# Altium PCB Ecg.PcbDoc
Units mm, origin at the board's own origin, x right, y up, seen from the top; angles counter-clockwise.
Board outline 95 x 41 mm, 2 copper layers (Top Layer, Bottom Layer), stack 0.325 mm thick; 107 components, 77 nets, 403 pads, 700 vias.
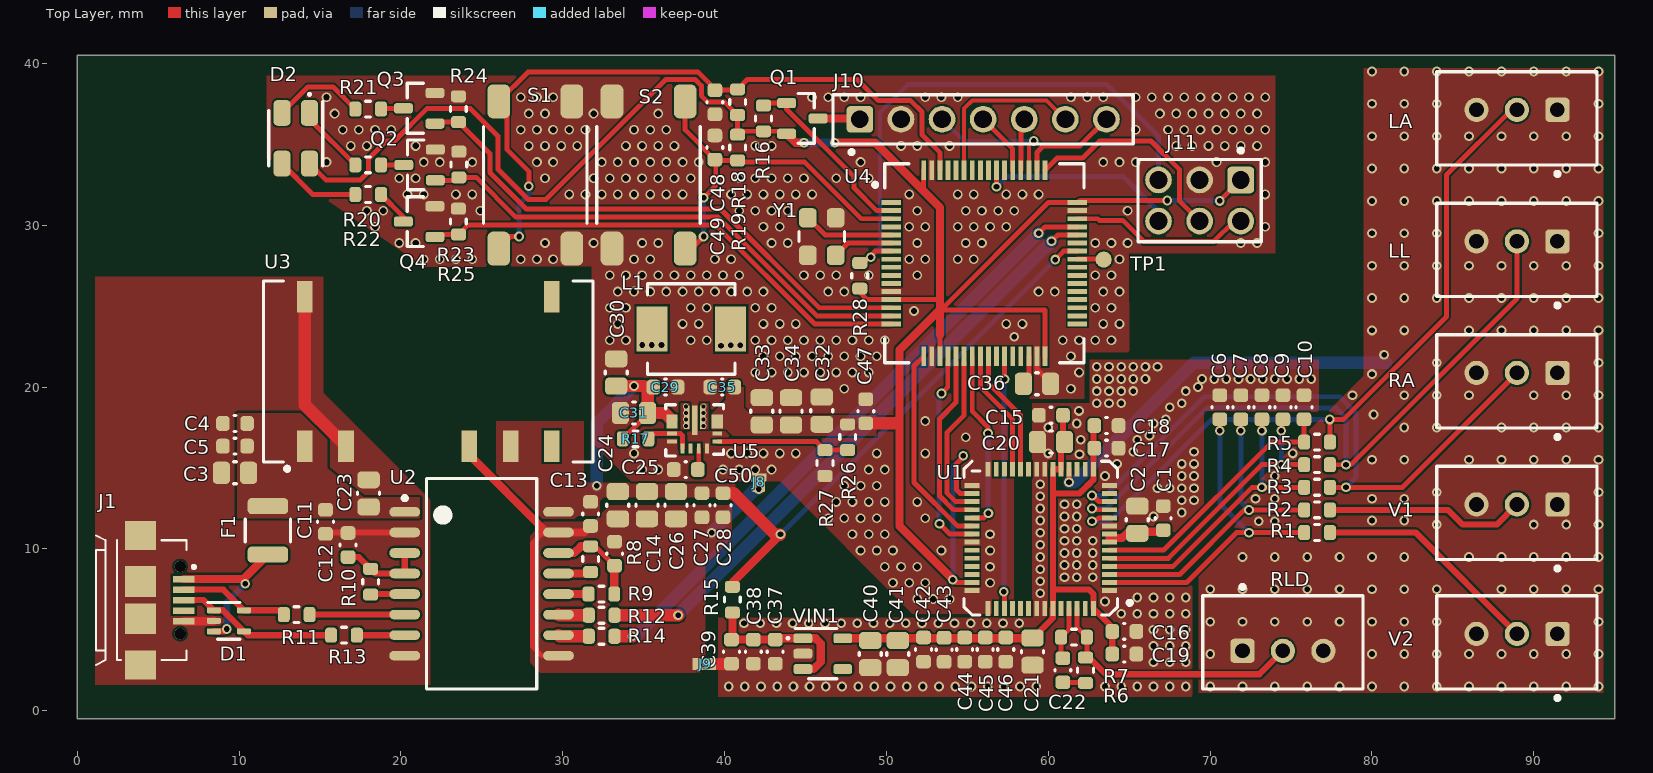
[diagram p0: Top Layer view]
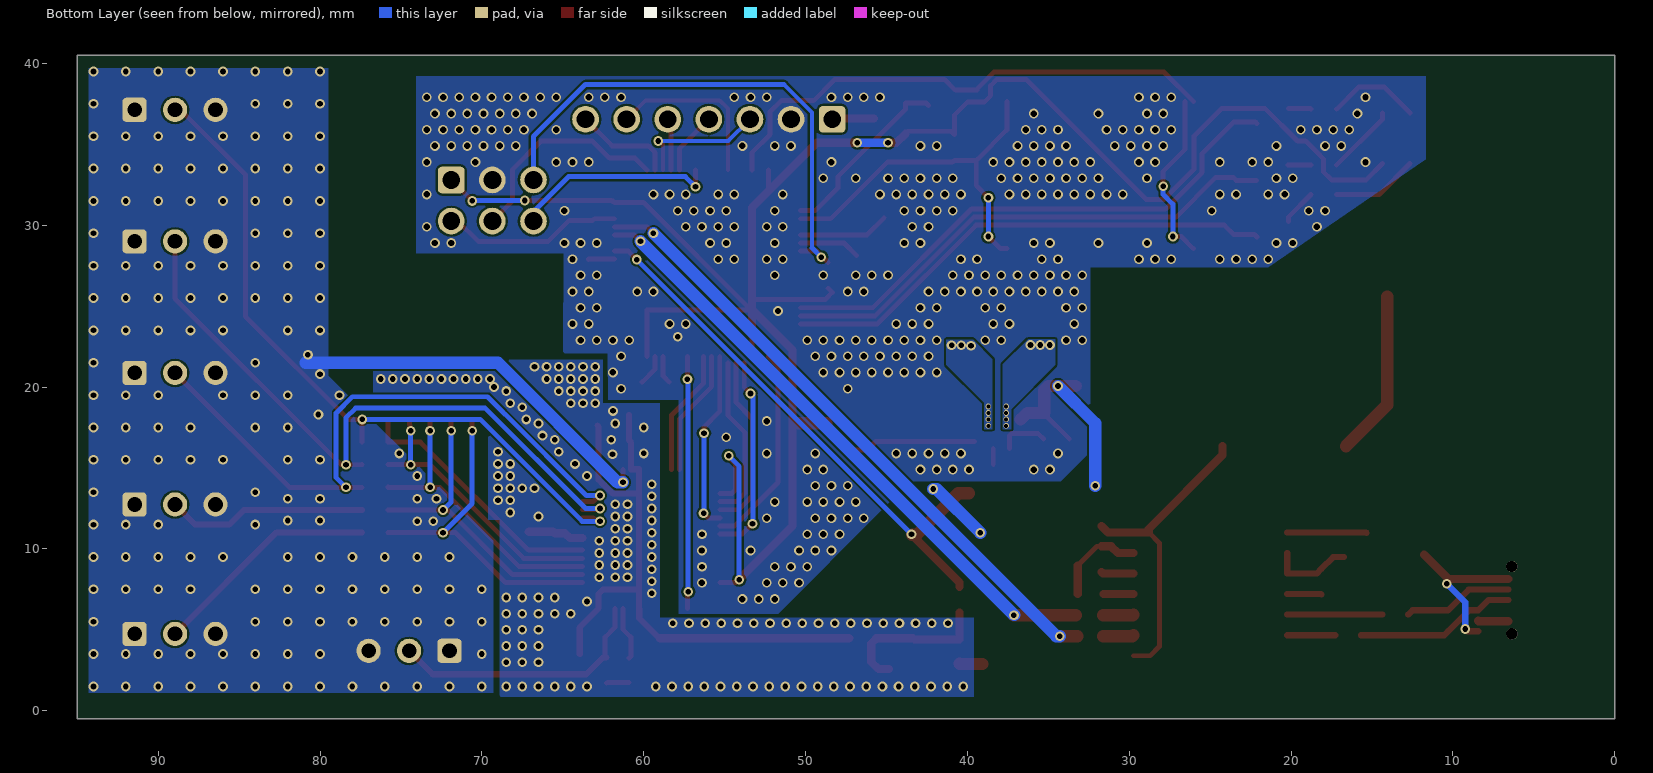
[diagram p1: Bottom Layer view, seen from below]
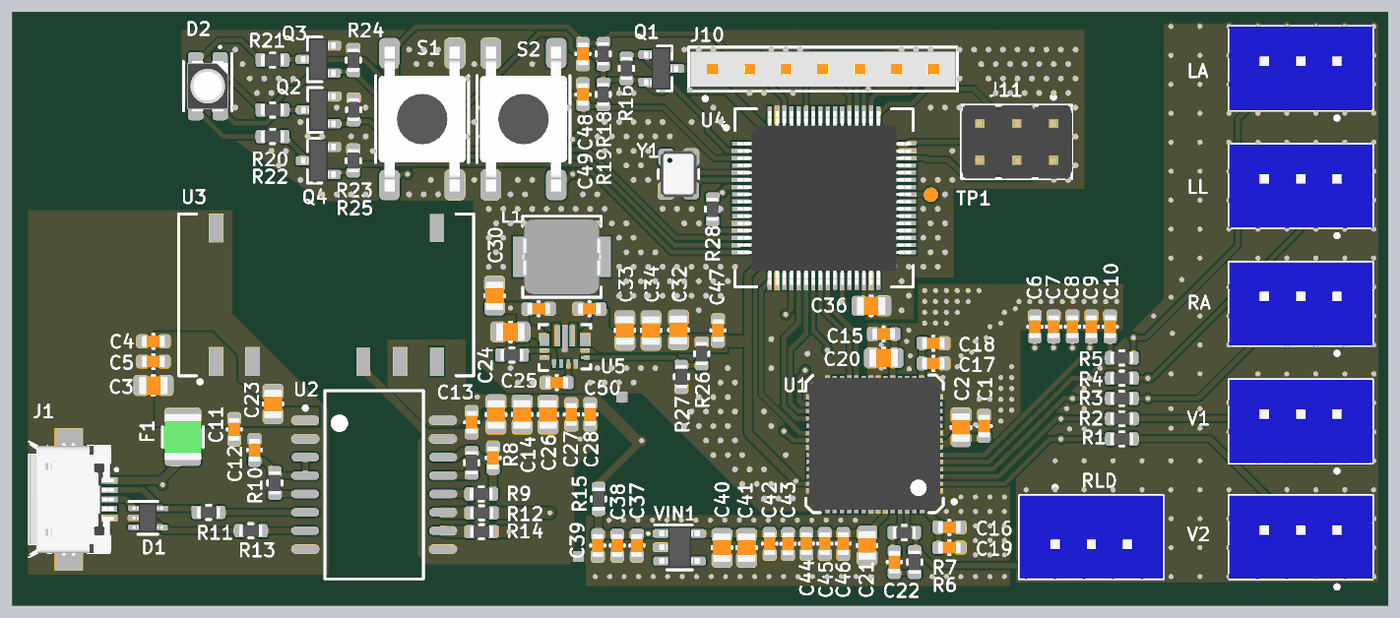
[diagram p2: 3D render of the assembled board from above, using the file's embedded part models]

## Layer stack, top to bottom
Top Solder: solder mask 0.0102, Solder Resist, Dk 3.5
Top Layer: signal copper 0.0356
Dielectric 1: core 0.254, FR-4, Dk 4.2
Bottom Layer: signal copper 0.0356
Bottom Solder: solder mask 0.0102, Solder Resist, Dk 3.5

## Board outline
0,-0.5 95,-0.5 95,40.5 0,40.5

## Design rules (kind name [scope] priority, off if disabled: settings)
Clearance [All] p1: gap=0.127 ignorepadtopadclearanceinfootprint=FALSE except(0: Arc-Hole Track-Hole SMDPad-Hole THPad-Hole Via-Hole Fill-Hole Poly-Hole Region-Hole Text-Hole)
HoleSize [All] p1: absolutevalues=TRUE maxlimit=6.3 minlimit=0.2 maxpercent=80.000 minpercent=20.000
HoleToHoleClearance [All] p1: gap=0.15 allowstackedmicrovias=TRUE
MinimumSolderMaskSliver [All] p1: minsoldermaskwidth=0.127
PlaneConnect [All] p1: planeconnectstyle=Direct reliefexpansion=0.508 reliefentries=4 reliefconductorwidth=0.254 reliefairgap=0.254
PolygonConnect [All] p1: connectstyle=Direct reliefconductorwidth=0.254 reliefentries=4 polygonreliefangle="90 Angle" airgapwidth=0.254
RoutingVias [All] p1: holewidth=0.6 width=0.35 viastyle="Through Hole" minholewidth=0.35 minwidth=0.3 maxholewidth=1.7 maxwidth=1.5
SilkToSilkClearance [All] p1: silktosilkclearance=0.15
SilkToSolderMaskClearance [IsPad] p1: minsilkscreentomaskgap=0.08 clearancetoexposedcopper=TRUE
SolderMaskExpansion "SMD IC-s" [InComponent('U5')] p1: expansion=0.01
SolderMaskExpansion [All] p2: expansion=0.03
Width [All] p1: maxlimit=1.524 minlimit=0.203 preferedwidth=0.254 minimp=50.000000 maximp=50.000000 favimp=50.000000
24 further rules are at their usual default settings.

## Components (designator, comment, footprint, x,y, rotation, side; value= is the part's Value field where it differs from the comment)
C1 "100n" C0603_N 67.1,11.9 r90 top
C2 "10u" C0805_N 65.5,11.8 r90 top
C3 "10u" C0805_N 9.746,14.7 r180 top
C4 "100n" C0603_N 9.746,17.748 r180 top
C5 "100n" C0603_N 9.746,16.351 r180 top
C6 "10n" C0603_N 70.6,18.755 r270 top
C7 "10n" C0603_N 71.9,18.755 r270 top
C8 "10n" C0603_N 73.2,18.755 r270 top
C9 "10n" C0603_N 74.5,18.755 r270 top
C10 "10n" C0603_N 75.8,18.755 r270 top
C11 "100n" C0603_N 15.334,11.669 r270 top
C12 "100n" C0603_N 16.731,10.238 r90 top
C13 "100n" C0603_N 31.717,12.16 r270 top
C14 "100n" C0603_N 33.2,9.7 r90 top
C15 "100n" C0603_N 60.165,18.256 r180 top
C16 "100n" C0603_N 64.7,4.9 r0 top
C17 "100n" C0603_N 63.594,16.224 r0 top
C18 "100n" C0603_N 63.594,17.621 r0 top
C19 "100n" C0603_N 64.7,3.5 r0 top
C20 "10u" C0805_N 60.165,16.605 r180 top
C21 "10u" C0805_N 59.022,3.651 r270 top
C22 "2n" C0603_N 60.9,2.5 r270 top
C23 "10u" C0805_N 18.001,13.43 r90 top
C24 "10u" C0805_N 33.4,12.7 r270 top
C25 "10u" C0805_N 35.2,12.7 r270 top
C26 "10u" C0805_N 37,12.7 r270 top
C27 "100n" C0603_N 38.6,12.7 r270 top
C28 "100n" C0603_N 39.9,12.7 r270 top
C29 "10u" C0603_N 36.345,20 r0 top
C30 "10u" C0805_N 33.3,20.9 r90 top
C31 "100n" C0805_N 34.4,18.4 r180 top
C32 "22u" C0805_N 46,18.54 r90 top
C33 "22u" C0805_N 42.3,18.5 r90 top
C34 "22u" C0805_N 44.1,18.5 r90 top
C35 "1u" C0603_N 39.855,20 r180 top
C36 "10u" C0805_N 59.3,20.2 r0 top
C37 "1u" C0603_N 43.125,3.65 r270 top
C38 "100n" C0603_N 41.775,3.65 r270 top
C39 "100n" C0603_N 40.425,3.65 r270 top
C40 "10u" C0805_N 49,3.5 r270 top
C41 "10u" C0805_N 50.7,3.5 r270 top
C42 "1u" C0603_N 52.291,3.778 r270 top
C43 "100n" C0603_N 53.561,3.761 r270 top
C44 "100n" C0603_N 54.831,3.778 r270 top
C45 "100n" C0603_N 56.101,3.778 r270 top
C46 "10n" C0603_N 57.371,3.778 r270 top
C47 "100n" C0603_N 48.725,18.5 r90 top
C48 "100n" C0603_N 39.4,37.6 r270 top
C49 "100n" C0603_N 39.4,34.8 r90 top
C50 "100n" C0603_N 37.6,14.9 r180 top
D1 "ESDA25W5" SOT353_12345 9.365,5.556 r270 top
D2 "RGB" LED3528_RGB 13.5,35.375 r180 top
F1 "FUSE" FUSE1210 11.778,11.144 r270 top
J1 "USB_OTG" WR-COM-629105136821 3.904,5.683 r270 top
J8 "2 way net tie junction" 2way_HP#1 42.1,13.011 r90 top net-tie
J9 "2 way net tie junction" 2way_HP#2 39.083,2.889 r0 top net-tie
J10 "SOCHDR_7X1" PINSOCK_7X1_THT 55.974,36.544 r0 top
J11 "=Value" PINHDR_3X2_THT_2,54 69.35,31.525 r180 top
L1 "1.5u" IHLP2020 37.94,23.59 r0 top
LA "=Value" B3B-XH-A 91.46,37.128 r180 top
LL "=Value" B3B-XH-A 91.46,29 r180 top
Q1 "=Value" SOT23_123_N 44.8,36.6 r270 top
Q2 "MOSFET_N" SOT23_123_N 21.15,33.725 r90 top
Q3 "MOSFET_N" SOT23_123_N 21.125,37.225 r90 top
Q4 "MOSFET_N" SOT23_123_N 21.125,30.225 r90 top
R1 "1k" R0603_N 76.605,11.012 r0 top
R2 "10k" R0603_N 76.605,12.409 r0 top
R3 "10k" R0603_N 76.605,13.806 r0 top
R4 "10k" R0603_N 76.605,15.203 r0 top
R5 "10k" R0603_N 76.605,16.6 r0 top
R6 "100k" R0603_N 62.3,2.5 r90 top
R7 "330k" R0603_N 61.584,4.543 r0 top
R8 "1M" R0603_N 31.717,9.366 r90 top
R9 "1M" R0603_N 32.385,7.207 r0 top
R10 "1M" R0603_N 18.128,7.969 r270 top
R11 "24R" R0603_N 13.556,5.937 r0 top
R12 "24R" R0603_N 32.405,5.9 r0 top
R13 "24R" R0603_N 16.477,4.667 r0 top
R14 "24R" R0603_N 32.4,4.6 r0 top
R15 "10R" R0603_N 40.48,6.859 r90 top
R16 "24R" R0603_N 42.4,36.6 r90 top
R17 "10k" R0603_N 34.5,16.8 r0 top
R18 "24R" R0603_N 40.8,37.6 r90 top
R19 "24R" R0603_N 40.8,34.8 r270 top
R20 "24R" R0603_N 17.975,33.725 r180 top
R21 "24R" R0603_N 17.975,37.175 r180 top
R22 "24R" R0603_N 17.975,31.9 r180 top
R23 "24R" R0603_N 23.575,33.75 r270 top
R24 "24R" R0603_N 23.55,37.17 r270 top
R25 "24R" R0603_N 23.55,30.225 r270 top
R26 "10k" R0603_N 47.6,16.9 r270 top
R27 "10k" R0603_N 46.2,15.305 r270 top
R28 "10k" R0603_N 48.35,26.875 r90 top
RA "=Value" B3B-XH-A 91.46,20.872 r180 top
RLD "=Value" B3B-XH-A 72,3.7 r0 top
S1 "PUSHBUTTON" TACT6X6_SMD 28.3,33.1 r0 top
S2 "PUSHBUTTON" TACT6X6_SMD 35.3,33.1 r180 top
TP1 "TP" TP_1MM 63.425,27.875 r90 top
U1 "ADAS1000" LFCSP-56 64.284,7.418 r180 top
U2 "ADuM4160" "SOIC-16 Wide" 24.986,7.842 r0 top
U3 "DCPA10505" "SOP-14 (isolator)" 14.064,16.351 r90 top
U4 "STM32F446RE" LQFP64 50.3,31.4 r0 top
U5 "=Value" TPS63070 36.369,15.843 r90 top
V1 "=Value" B3B-XH-A 91.46,12.744 r180 top
V2 "=Value" B3B-XH-A 91.46,4.743 r180 top
VIN1 "ADP151" SOT23-5 46.068,3.524 r270 top
Y1 "XTAL_1234" 3225_N 46,29.3 r270 top

## Footprints (in the part's own frame and the unit in brackets; to place one, negate y for a bottom-side part, rotate by r counter-clockwise, add the part's x,y. Pads: shape width x height; smd on the part's side, far side on the other; paste and mask are expansions set on the pad)
2way_HP#1 [mil] "2 way high power power net tie junction"
  rrect5% 30x30 smd: 1(35,0)
  rrect5% 19.68x39.37 smd paste-100: 2(54.69,0)
2way_HP#2 [mil] "2 way high power power net tie junction"
  rrect5% 39.37x30 smd paste-100: 1(-22.95,0)
  rrect5% 30x30 smd paste+0: 2(0,0)
3225_N [mm] "Oscillator, Corner Concave; 3.20 mm L X 2.50 mm W X 0.75 mm H body"
  rrect46% 1.19x1.09 smd: 1(-1.16,-0.86) 2(1.16,-0.86) 3(1.16,0.86) 4(-1.16,0.86)
  silkscreen extent -0.3,-1.4 0.3,1.4, body extent -1.6,-1.25 1.6,1.25, height 0.75
B3B-XH-A [mm] "Header, Vertical, 2.50 mm pitch; 0.70 mm lead width, 5 pins, 1 row, 5 pins per row, 14.90 mm L X 5.75 mm W X 7.00 mm H body"
  rrect33% 1.5x1.5 / inner round 1.5 / far side rrect33% 1.5x1.5 hole 0.9 paste-1.5: 1(0,0)
  round 1.5 hole 0.9 paste-1.5: 2(2.5,0) 3(5,0)
  silkscreen extent -2.45,-2.35 7.45,4.08, body extent -2.45,-2.35 7.45,3.4, height 7.05
C0603_N [mm] "Capacitor, Chip; 1.60 mm L X 0.80 mm W X 0.87 mm H body"
  rrect50% 0.84x0.91 smd: 1(-0.745,0) 2(0.745,0)
  silkscreen extent -0.05,-0.49 0.05,0.49, body extent -0.8,-0.4 0.8,0.4, height 0.87
C0805_N [mm] "Capacitor, Chip; 2.00 mm L X 1.25 mm W X 1.35 mm H body"
  rrect48% 1.05x1.38 smd: 1(-0.84,0) 2(0.84,0)
  silkscreen extent -0.08,-0.68 0.08,0.68, body extent -1,-0.63 1,0.63, height 1.35
FUSE1210 [mm] "Fuse, Chip; 3.215 mm L X 2.575 mm W X 1.80 mm H body"
  rrect50% 1x2.5 smd: 1(-1.5,0) 2(1.5,0)
  silkscreen extent -0.7,-1.4 0.7,1.4, body extent -1.61,-1.29 1.61,1.29, height 1.8
IHLP2020 [mm] "Inductor, 5.18mm L X 5.18mm W X 3 mm H body"
  rect 1.905x2.79 smd: 1(-2.425,0) 2(2.425,0)
  silkscreen extent -2.7,-2.8 2.7,2.8, body extent -2.73,-2.57 2.73,2.57, height 2.84
LED3528_RGB [mm] "Small Outline L-Lead (SOL), 1.70 mm pitch; 4 pin, 2.80 mm L X 3.20 mm W X 2.10 mm H body"
  rrect48% 1.05x1.59 smd: A(-0.85,1.565) B(0.85,1.565) G(0.85,-1.565) R(-0.85,-1.565)
  silkscreen extent -1.68,-2.78 1.68,1.7, body extent -1.4,-1.75 1.4,1.75, height 1.9
LFCSP-56 [mm]
  rect 0.9x0.3 smd: 1(0.5,0) 2(0.5,-0.5) 3(0.5,-1) 4(0.5,-1.5) 5(0.5,-2) 6(0.5,-2.5) 7(0.5,-3) 8(0.5,-3.5) 9(0.5,-4) 10(0.5,-4.5) 11(0.5,-5) 12(0.5,-5.5) 13(0.5,-6) 14(0.5,-6.5) 29(9,-6.5) 30(9,-6) 31(9,-5.5) 32(9,-5) 33(9,-4.5) 34(9,-4) 35(9,-3.5) 36(9,-3) 37(9,-2.5) 38(9,-2) 39(9,-1.5) 40(9,-1) 41(9,-0.5) 42(9,0)
  rect 0.3x0.9 smd: 15(1.5,-7.5) 16(2,-7.5) 17(2.5,-7.5) 18(3,-7.5) 19(3.5,-7.5) 20(4,-7.5) 21(4.5,-7.5) 22(5,-7.5) 23(5.5,-7.5) 24(6,-7.5) 25(6.5,-7.5) 26(7,-7.5) 27(7.5,-7.5) 28(8,-7.5) 43(8,1.1) 44(7.5,1.1) 45(7,1.1) 46(6.5,1.1) 47(6,1.1) 48(5.5,1.1) 49(5,1.1) 50(4.5,1.1) 51(4,1.1) 52(3.5,1.1) 53(3,1.1) 54(2.5,1.1) 55(2,1.1) 56(1.5,1.1)
  silkscreen extent -0.88,-8 9.5,1.5, body extent 0.19,-7.81 9.31,2.5, height 12
LQFP64 [mm]
  rect 1.2x0.3 smd: 1(0,0) 2(0,-0.5) 3(0,-1) 4(0,-1.5) 5(0,-2) 6(0,-2.5) 7(0,-3) 8(0,-3.5) 9(0,-4) 10(0,-4.5) 11(0,-5) 12(0,-5.5) 13(0,-6) 14(0,-6.5) 15(0,-7) 16(0,-7.5) 33(11.5,-7.5) 34(11.5,-7) 35(11.5,-6.5) 36(11.5,-6) 37(11.5,-5.5) 38(11.5,-5) 39(11.5,-4.5) 40(11.5,-4) 41(11.5,-3.5) 42(11.5,-3) 43(11.5,-2.5) 44(11.5,-2) 45(11.5,-1.5) 46(11.5,-1) 47(11.5,-0.5) 48(11.5,0)
  rect 0.3x1.2 smd: 17(2,-9.5) 18(2.5,-9.5) 19(3,-9.5) 20(3.5,-9.5) 21(4,-9.5) 22(4.5,-9.5) 23(5,-9.5) 24(5.5,-9.5) 25(6,-9.5) 26(6.5,-9.5) 27(7,-9.5) 28(7.5,-9.5) 29(8,-9.5) 30(8.5,-9.5) 31(9,-9.5) 32(9.5,-9.5) 49(9.5,2) 50(9,2) 51(8.5,2) 52(8,2) 53(7.5,2) 54(7,2) 55(6.5,2) 56(6,2) 57(5.5,2) 58(5,2) 59(4.5,2) 60(4,2) 61(3.5,2) 62(3,2) 63(2.5,2) 64(2,2)
  silkscreen extent -1.12,-9.9 11.9,2.4, body extent -0.25,-9.75 11.75,2.25, height 1.56
PINHDR_3X2_THT_2,54 [mm] "THT Vertical Pin Header, Pitch 2.54mm, Dual Row,  6 pins"
  rrect30% 1.65x1.65 / inner round 1.65 / far side rrect30% 1.65x1.65 hole 1.1 paste-1.65: 1(-2.54,-1.27)
  round 1.65 hole 1.1 paste-1.65: 2(-2.54,1.27) 3(0,-1.27) 4(0,1.27) 5(2.54,-1.27) 6(2.54,1.27)
  silkscreen extent -3.81,-3.21 3.81,2.54, body extent -3.81,-2.54 3.81,2.54, height 8.55
PINSOCK_7X1_THT [mm] "THT Vertical Pin Header, Pitch 2.54mm, Dual Row, 7 pins"
  rrect30% 1.65x1.65 / inner round 1.65 / far side rrect30% 1.65x1.65 hole 1.1 paste-1.65: 1(-7.62,0)
  round 1.65 hole 1.1 paste-1.65: 2(-5.08,0) 3(-2.54,0) 4(0,0) 5(2.54,0) 6(5.08,0) 7(7.62,0)
  silkscreen extent -9.27,-2.16 9.27,1.52, body extent -9.14,-1.21 9.14,1.21, height 8.51
R0603_N [mm] "Resistor, Chip; 1.60 mm L X 0.80 mm W X 0.55 mm H body"
  rrect51% 0.74x0.93 smd: 1(-0.795,0) 2(0.795,0)
  silkscreen extent -0.15,-0.49 0.15,0.49, body extent -0.8,-0.4 0.8,0.4, height 0.55
"SOIC-16 Wide" [mm] "SOIC, 16-Leads, Body 13x7.50mm, Pitch 1.27mm, IPC Medium Density"
  oval 1.9x0.6 smd: 1(-4.75,4.445) 2(-4.75,3.175) 3(-4.75,1.905) 4(-4.75,0.635) 5(-4.75,-0.635) 6(-4.75,-1.905) 7(-4.75,-3.175) 8(-4.75,-4.445) 9(4.75,-4.445) 10(4.75,-3.175) 11(4.75,-1.905) 12(4.75,-0.635) 13(4.75,0.635) 14(4.75,1.905) 15(4.75,3.175) 16(4.75,4.445)
  silkscreen extent -4.87,-6.5 3.4,6.5, body extent -3.8,-5.25 3.8,5.25, height 2.65
"SOP-14 (isolator)" [mm] "SOP-14, 7-Leads, Body 7x19mm, Pitch 2,54mm"
  rect 1.95x0.96 smd: 1(0,0) 2(0,-2.54) 5(0,-10.17) 6(0,-12.71) 7(0,-15.25) 8(9.23,-15.25) 14(9.23,0)
  silkscreen extent -1.52,-17.8 10.2,2.56
SOT23-5 [mm] "Small Outline Transistor (SOT23), 0.95 mm pitch; 5 pin, 2.90 mm L X 1.60 mm W X 1.45 mm H body"
  rrect49% 0.61x1.16 smd: 1(-0.95,-1.23) 2(0,-1.23) 3(0.95,-1.23) 4(0.95,1.23) 5(-0.95,1.23)
  silkscreen extent -1.56,-2.23 1.56,0.88, body extent -1.45,-1.4 1.45,1.4, height 1.45
SOT23_123_N [mm] "Small Outline Transistor (SOT23), 0.95 mm pitch; 3 pin, 2.90 mm L X 1.30 mm W X 1.10 mm H body"
  rrect51% 0.63x1.17 smd: 1(-0.95,-0.975) 2(0.95,-0.975) 3(0,0.975)
  silkscreen extent -1.54,-0.25 1.54,0.74, body extent -1.45,-1.2 1.45,1.2, height 1.1
SOT353_12345 [mm] "Small Outline Transistor (SOT23), 0.65 mm pitch; 5 pin, 2.00 mm L X 1.25 mm W X 1.00 mm H body"
  rrect49% 0.37x0.87 smd: 1(-0.65,-0.93) 2(0,-0.93) 3(0.65,-0.93) 4(0.65,0.93) 5(-0.65,0.93)
  silkscreen extent -1.14,-1.31 1.14,0.68, body extent -1,-1.05 1,1.05, height 1
TACT6X6_SMD [mm] "SMD Tact switch 4 pol"
  rrect50% 1.4x2.1 smd: 1(-2.26,-4.55) 1(-2.26,4.55) 2(2.26,-4.55) 2(2.26,4.55)
  silkscreen extent -3.2,-3 3.2,3, body extent -3,-5 3,5, height 4.98
TP_1MM [mm]
  round 1 smd paste-100 mask+0: 1(0,0)
TPS63070 [mm]
  rect 0.6x0.24 smd: 1(0.357,-1.031) 2(0.357,-1.531) 3(0.357,-2.031) 4(0.357,-2.531)
  rect 0.24x0.6 smd: 5(0.782,-3.181) 6(1.282,-3.181) 14(1.282,-0.381) 15(0.782,-0.381)
  rect 0.85x0.7 smd: 7(2.032,-3.181) 8(2.032,-3.181) 12(2.032,-0.381) 13(2.032,-0.381)
  rect 1.45x0.35 smd: 9(2.282,-2.281) 11(2.282,-1.281)
  rect 1.8x0.35 smd: 10(2.107,-1.781)
  silkscreen extent -0.1,-3.56 3.06,0
WR-COM-629105136821 [mm] "5 pins"
  rect 0.4x1.35 smd: D_N(-1.8,2.675) D_P(-1.15,2.675) GND(0.15,2.675) ID(-0.5,2.675) VBUS(-2.45,2.675)
  rect 1.8x1.9 smd: S(-5.15,0) S(2.85,0)
  rect 1.9x1.9 smd: S(-2.3,0) S(0,0)
  round 0.7 hole 0.7 unplated: ""(-3.225,2.45) ""(0.925,2.45)
  silkscreen extent -5.15,-2.75 2.85,3.36, body extent -5.15,-2.76 2.85,3.15, height 2.69

## Part data
C1 C2 C3 C4 C5 C6 C7 C8 C9 C10 C11 C12 C13 C14 C15 C16 C17 C18 C19 C20 C21 C22 C23 C24 C25 C26 C27 C28 C29 C30 C31 C32 C33 C34 C35 C36 C37 C38 C39 C40 C41 C42 C43 C44 C45 C46 C47 C48 C49 C50: library part CAP, RevS="$Rev:: 58        $"
D2: library part LED_RGB_CANODE
J1: "USB Connector, With Pegs, Micro USB Type B, USB 2.0, Receptacle, 5 Ways, Surface Mount, Right Angle"
J8 J9: library part NetTie_2, ComponentLink1Description=Source, ComponentLink1URL=http://www.edatools.cz/addons, FootprintNote="LP=12mil, MP=40mil, HP=120mil"
J10: "Socket", ComponentLink1Description=Manufacturer, ComponentLink1URL=http://www.we-online.de, ComponentLink2Description=Datasheet, ComponentLink2URL=http://katalog.we-online.de/em/datasheet/691412320002.pdf
J11: library part PINHDR_3x2
L1: library part IND, "Inductor"
LA LL RA RLD V1 V2: library part PINHDR_3X1, "Socket", ComponentLink1Description=Manufacturer, ComponentLink1URL=http://www.we-online.de, ComponentLink2Description=Datasheet, ComponentLink2URL=http://katalog.we-online.de/em/datasheet/691412320002.pdf
Q1: library part MOSFET_P
R1 R2 R3 R4 R5 R6 R7 R8 R9 R10 R11 R12 R13 R14 R15 R16 R17 R18 R19 R20 R21 R22 R23 R24 R25 R26 R27 R28: library part RES
U1: "Low Power, Five Electrode / Electrocardiogram (ECG) Analog Front End"
U5: library part TPS63070, "2-V to 16-V Buck-Boost Converter With 3.6-A Switch Current"

## Via types
v1: diameter 0.6, hole 0.35, Top Layer to Bottom Layer, tented both sides, 363 vias
v2: diameter 0.6, hole 0.4, Top Layer to Bottom Layer, tented both sides, 329 vias
v3: diameter 0.35, hole 0.25, Top Layer to Bottom Layer, tented both sides, 8 vias

## Nets (pads, with @x,y where several pads share a name; then routed paths per layer and width w, separated by ;. In a path a pad name is that pad's centre, name@x,y a point inside that pad or via, vN(x,y) a via of type N, cw(c..) or ccw(c..) an arc to the next point about the centre after c; other vN are vias at no path point)
ADAS_CLKIO: U1.45 U4.27 | length 15.6
  Top Layer w0.305: v1(57.25,7.35) 57.284,7.316 U1.45 ; v1(57.3,20.475) U4.27
  Bottom Layer w0.305: v1(57.25,7.35) 57.25,20.425 v1(57.3,20.475)
ADAS_CS: U1.35 U4.20 | length 12.3
  Top Layer w0.305: v1(53.275,11.55) 53.907,10.918 U1.35 ; v1@53.5,19.7 53.788,19.988 53.788,21.488 U4.20@53.8,21.5
  Bottom Layer w0.305: v1@53.25,11.55 53.25,19.45 v1(53.4,19.6)
ADAS_DRDY: U1.34 U4.17 | length 12.7
  Top Layer w0.305: U4.17 51.7,21.3 51.7,14.1 54.382,11.418 U1.34
ADAS_PD: U1.25 U4.24 | length 7.8
  Top Layer w0.305: U4.24 55.8,20.025 57.784,18.041 U1.25
ADAS_RESET: U1.24 U4.25 | length 7.8
  Top Layer w0.305: U4.25 56.3,20.25 58.284,18.266 U1.24
ADAS_SCLK: U1.32 U4.21 | length 11
  Top Layer w0.305: U4.21@54.3,21.5 54.3,19.05 53.275,18.025 53.275,13.275 54.132,12.418 U1.32
ADAS_SDI: U1.33 U4.23 | length 11.4
  Top Layer w0.305: U1.33 56.018,11.918 v1(56.3,12.2) ; U4.23 55.3,19.6 55.3,18.5 56.275,17.525 v1(56.275,17.15)
  Bottom Layer w0.305: v1@56.275,12.075 v1(56.275,17.15)
ADAS_SDO: U1.31 U4.22 | length 10.3
  Top Layer w0.305: U4.22@54.8,21.5 54.8,18.25 53.73,17.18 53.73,13.463 54.275,12.918 U1.31
AGND: C1.2 C2.2 C6.1 C7.1 C8.1 C9.1 C10.1 C15.2 C16.2 C17.2 C18.2 C19.2 C20.2 C21.2 C37.2 C38.2 C39.2 C40.2 C41.2 C42.2 C43.2 C44.2 C45.2 C46.2 J9.2 U1.1 U1.9 U1.14 U1.21 U1.22 U1.49 U1.50 VIN1.2 | length 1.4
  Top Layer w0.762: J9.2 40.463,2.889 C39.2@40.48,2.906
  other v1: 40.25,1.5 41.25,1.5 42.25,1.5 43.25,1.5 44.25,1.5 45.25,1.5 46.25,1.5 47.25,1.5 48.25,1.5 49.25,1.5 50.25,1.5 51.25,1.5 52.25,1.5 53.25,1.5 54.25,1.5 55.25,1.5 56.25,1.5 57.25,1.5 58.25,1.5 59.25,1.5 63.5,1.5 64.5,1.5 65.5,1.5 66.5,1.5 67.5,1.5 68.5,1.5 66.5,3 67.5,3 68.5,3 66.5,4 67.5,4 68.5,4 66.5,5 67.5,5 68.5,5 41.2,5.4 42.2,5.4 43.2,5.4 44.2,5.4 45.2,5.4 46.2,5.4 47.2,5.4 48.2,5.4 49.2,5.4 50.2,5.4 51.2,5.4 52.2,5.4 53.2,5.4 54.2,5.4 55.2,5.4 56.2,5.4 57.2,5.4 58.2,5.4 64.5,6 65.5,6 66.5,6 67.5,6 68.5,6 63.5,6.75 65.5,7 66.5,7 67.5,7 68.5,7 59.5,7.25 59.5,8 61,8.25 61.75,8.25 62.75,8.25 59.5,8.75 61,9 61.75,9 62.75,9 59.5,9.5 61,9.75 61.75,9.75 62.75,9.75 59.5,10.25 61,10.5 61.75,10.5 62.75,10.5 59.5,11 61,11.25 61.75,11.25 59.5,11.75 61,12 61.75,12 66.5,12 68.25,12.25 59.5,12.5 61,12.75 61.75,12.75 68.25,13 69,13 59.5,13.25 66.75,13.75 67.5,13.75 68.25,13.75 69,13.75 59.5,14 63.5,14.5 68.25,14.5 69,14.5 64.25,15.25 68.25,15.25 69,15.25 61.925,15.85 60,15.9 65.25,16 69,16 62,16.75 65.5,16.75 66.25,17 60,17.5 61.75,17.75 66.5,17.75 67.25,18 61.9,18.525 67.5,18.75 63,19 63.75,19 64.5,19 68.25,19 63,19.75 63.75,19.75 64.5,19.75 65.25,19.75 68.5,19.75 69.25,20 63,20.5 63.75,20.5 64.5,20.5 65.25,20.5 66,20.5 69.5,20.5 70.25,20.5 71,20.5 71.75,20.5 72.5,20.5 73.25,20.5 74,20.5 74.75,20.5 75.5,20.5 76.25,20.5 63,21.25 63.75,21.25 64.5,21.25 65.25,21.25 66,21.25 66.75,21.25
AVDD: C15.1 C16.1 C17.1 C18.1 C19.1 C20.1 C21.1 C40.1 C41.1 C42.1 C43.1 C44.1 C45.1 C46.1 U1.15 U1.19 U1.20 U1.51 U1.56 VIN1.5 | length 39.6
  Top Layer w0.381: C21.1 59.039,4.491 60.274,5.727 60.274,6.318 U1.51 60.284,7.5 ; C15.1 60.91,16.7 60.784,16.574 U1.19 U1.20 60.284,13.425 ; C18.1 62.784,17.556 U1.15 62.784,14.271 62.453,13.94 62.435,13.94 62.059,13.565 62.059,13.547 61.938,13.425 60.284,13.425 ; C19.1 C16.1 63.955,5.147 U1.56 62.784,7.216 62.5,7.5 60.284,7.5 ; 60.284,7.5 60.284,13.425
  Top Layer w0.508: VIN1.5 59.005,4.474 C21.1
DD+: R14.2 U4.45 | length 39.1
  Top Layer w0.305: v1(59.4,29.5) 59.8,29.9 U4.45
  Top Layer w0.762: R14.2 v1(34.3,4.6)
  Bottom Layer w0.762: v1(34.3,4.6) 34.5,4.6 v1(59.4,29.5)
DD-: R12.2 U4.44 | length 38.2
  Top Layer w0.305: v1(60.2,29) 60.6,29.4 U4.44
  Top Layer w0.762: R12.2@33.3,5.9 v1(37.125,5.9)
  Bottom Layer w0.762: v1@37.112,5.913 v1(60.2,29)
DGND: C29.2 C30.2 C31.2 C32.2 C33.2 C34.2 C35.2 C36.2 C47.2 C48.2 C49.2 C50.2 J8.2 J10.2 J11.3 Q2.2 Q3.2 Q4.2 R23.1 R24.1 R25.1 R27.2 S1.2 S2.2 U1.28 U1.29 U1.36 U1.42 U1.43 U4.12 U4.18 U4.31 U4.47 U4.63 U5.4 U5.6 U5.10 U5.15 Y1.2 Y1.4 | length 1.9
  Top Layer w0.305: U4.31 59.3,21.1 C36.2@60.1,20.3
  other v1: 56.4,8.9 56.4,10.9 57.9,23.1 51.7,24.7
  other v2: 51.9,6.9 52.9,6.9 53.9,6.9 50.4,7.9 51.4,7.9 52.4,7.9 56.4,7.9 49.9,8.9 50.9,8.9 51.9,8.9 48.4,9.9 49.4,9.9 50.4,9.9 53.4,9.9 56.4,9.9 47.9,10.9 48.9,10.9 49.9,10.9 46.4,11.9 47.4,11.9 48.4,11.9 49.4,11.9 52.4,11.9 46.9,12.9 47.9,12.9 48.9,12.9 49.9,12.9 51.9,12.9 47.4,13.9 48.4,13.9 49.4,13.9 34.9,14.9 35.9,14.9 39.9,14.9 40.9,14.9 41.9,14.9 42.9,14.9 48.9,14.9 49.9,14.9 34.4,15.9 40.4,15.9 41.4,15.9 42.4,15.9 43.4,15.9 44.4,15.9 49.4,15.9 52.4,15.9 54.9,16.9 52.4,17.9 47.4,19.9 61.4,19.9 41.9,20.9 42.9,20.9 43.9,20.9 44.9,20.9 45.9,20.9 46.9,20.9 47.9,20.9 48.9,20.9 61.9,20.9 42.4,21.9 43.4,21.9 44.4,21.9 45.4,21.9 46.4,21.9 47.4,21.9 48.4,21.9 49.4,21.9 61.4,21.9 32.9,22.9 33.9,22.9 37.9,22.9 38.9,22.9 41.9,22.9 42.9,22.9 43.9,22.9 44.9,22.9 45.9,22.9 46.9,22.9 47.9,22.9 48.9,22.9 49.9,22.9 60.9,22.9 61.9,22.9 62.9,22.9 63.9,22.9 33.4,23.9 37.4,23.9 38.4,23.9 42.4,23.9 43.4,23.9 44.4,23.9 57.4,23.9 58.4,23.9 63.4,23.9 64.4,23.9 32.9,24.9 33.9,24.9 37.9,24.9 38.9,24.9 41.9,24.9 42.9,24.9 62.9,24.9 63.9,24.9 33.4,25.9 34.4,25.9 35.4,25.9 36.4,25.9 37.4,25.9 38.4,25.9 39.4,25.9 40.4,25.9 41.4,25.9 42.4,25.9 46.4,25.9 47.4,25.9 59.4,25.9 60.4,25.9 63.4,25.9 64.4,25.9 32.9,26.9 33.9,26.9 34.9,26.9 35.9,26.9 36.9,26.9 37.9,26.9 38.9,26.9 39.9,26.9 40.9,26.9 44.9,26.9 45.9,26.9 46.9,26.9 48.9,26.9 51.9,26.9 62.9,26.9 63.9,26.9 21.4,27.9 22.4,27.9 23.4,27.9 24.4,27.9 27.4,27.9 28.4,27.9 29.4,27.9 34.4,27.9 35.4,27.9 39.4,27.9 40.4,27.9 51.4,27.9 52.4,27.9 54.4,27.9 55.4,27.9 64.4,27.9 19.9,28.9 20.9,28.9 28.9,28.9 31.9,28.9 34.9,28.9 35.9,28.9 42.9,28.9 43.9,28.9 51.9,28.9 54.9,28.9 55.9,28.9 62.9,28.9 63.9,28.9 64.9,28.9 71.9,28.9 72.9,28.9 18.4,29.9 42.4,29.9 43.4,29.9 51.4,29.9 52.4,29.9 54.4,29.9 55.4,29.9 56.4,29.9 57.4,29.9 73.4,29.9 17.9,30.9 18.9,30.9 24.9,30.9 40.9,30.9 41.9,30.9 42.9,30.9 43.9,30.9 51.9,30.9 54.9,30.9 55.9,30.9 56.9,30.9 57.9,30.9 64.9,30.9 20.4,31.9 21.4,31.9 23.4,31.9 24.4,31.9 30.4,31.9 31.4,31.9 32.4,31.9 33.4,31.9 34.4,31.9 35.4,31.9 36.4,31.9 37.4,31.9 40.4,31.9 41.4,31.9 42.4,31.9 43.4,31.9 44.4,31.9 45.4,31.9 51.4,31.9 54.4,31.9 55.4,31.9 57.4,31.9 58.4,31.9 59.4,31.9 73.4,31.9 19.9,32.9 20.9,32.9 28.9,32.9 31.9,32.9 32.9,32.9 33.9,32.9 34.9,32.9 35.9,32.9 36.9,32.9 37.9,32.9 40.9,32.9 41.9,32.9 42.9,32.9 43.9,32.9 44.9,32.9 46.9,32.9 48.9,32.9 15.4,33.9 21.4,33.9 22.4,33.9 24.4,33.9 28.4,33.9 29.4,33.9 32.4,33.9 33.4,33.9 34.4,33.9 35.4,33.9 36.4,33.9 37.4,33.9 38.4,33.9 48.4,33.9 63.4,33.9 64.4,33.9 65.4,33.9 70.4,33.9 73.4,33.9 16.9,34.9 17.9,34.9 20.9,34.9 27.9,34.9 28.9,34.9 29.9,34.9 30.9,34.9 33.9,34.9 34.9,34.9 35.9,34.9 36.9,34.9 41.9,34.9 42.9,34.9 50.9,34.9 51.9,34.9 53.9,34.9 67.9,34.9 68.9,34.9 69.9,34.9 70.9,34.9 71.9,34.9 72.9,34.9 16.4,35.9 17.4,35.9 18.4,35.9 19.4,35.9 27.4,35.9 28.4,35.9 29.4,35.9 30.4,35.9 31.4,35.9 34.4,35.9 35.4,35.9 36.4,35.9 65.4,35.9 67.4,35.9 68.4,35.9 69.4,35.9 70.4,35.9 71.4,35.9 72.4,35.9 73.4,35.9 15.9,36.9 27.9,36.9 28.9,36.9 31.9,36.9 35.9,36.9 66.9,36.9 67.9,36.9 68.9,36.9 69.9,36.9 70.9,36.9 71.9,36.9 72.9,36.9 15.4,37.9 27.4,37.9 28.4,37.9 29.4,37.9 45.4,37.9 46.4,37.9 47.4,37.9 48.4,37.9 52.4,37.9 53.4,37.9 54.4,37.9 61.4,37.9 62.4,37.9 63.4,37.9 65.4,37.9 66.4,37.9 67.4,37.9 68.4,37.9 69.4,37.9 70.4,37.9 71.4,37.9 72.4,37.9 73.4,37.9
DVDD: C32.1 C33.1 C34.1 C35.1 C47.1 D2.A J11.1 Q1.2 R16.1 R18.1 R19.1 R26.1 R28.1 U1.30 U1.41 U4.13 U4.19 U4.32 U4.48 U4.64 U5.7 U5.8 | length 133.8
  Top Layer w0.305: D2.A 15.36,32.8 17.5,32.8 18,33.3 18,34.107 18.385,34.492 19.096,35.204 19.604,35.204 21.6,37.2 24.3,37.2 26,35.5 26,33.448 27.848,31.6 28.963,31.6 36.365,39.002 38.18,39.002 38.562,38.62 38.562,38.003 38.965,37.6 40.005,37.6 R18.1 R19.1 41.01,35.805 R16.1 43.67,35.805 Q1.2 ; R28.1@48.6,26.105 48.348,25.853 48.8,25.4 U4.13 53.3,25.4 ; 52.3,32.1 U4.64 ; U4.19 53.3,23.2 ; 53.3,24.7 53.35,24.75 ; v1(54.1,8.1) 54.282,7.918 U1.41 ; v1(54.75,15.75) 54.75,15.675 54.325,15.25 54.325,13.65 54.557,13.418 U1.30 ; U4.32 59.8,24.75 53.35,24.75 ; v1(67.343,31.525) 61.98,31.525 61.93,31.475 61.902,31.502 U4.48 60,31.4 53.35,24.75 ; v1(70.597,31.502) J11.1
  Top Layer w0.508: Q1.2 44.375,35.1 v1(44.9,35.1) ; v1(46.8,35.1) 49.3,35.1 52.3,32.1 53.3,31.1 53.3,25.4 53.3,24.8 50.8,22.3 50.8,11.4 v1(54.1,8.1) ; 53.3,23.2 53.3,24.7
  Top Layer w0.762: C47.1@48.7,17.755 50.6,17.755
  Bottom Layer w0.305: v1(54.1,8.1) 54.1,15.1 v1(54.75,15.75) ; v1(67.343,31.525) 70.52,31.525 70.57,31.475 v1(70.597,31.502) ; J11.1@71.89,32.44 J11.1
  Bottom Layer w0.508: v1(44.9,35.1) v1(46.8,35.1)
ECG_LA: LA.2 R5.2 U1.10 | length 44.5
  Top Layer w0.305: v1(62.7,11.7) 62.9,11.7 63.118,11.918 U1.10 ; R5.2 v1(77.4,18) 78.25,18 84.602,24.352 84.602,27.75 84.6,27.752 84.6,29.248 84.602,29.25 84.602,29.75 84.6,29.752 84.6,31.248 84.602,31.25 84.602,31.75 84.6,31.752 84.6,33.1 88.628,37.128 LA.2
  Bottom Layer w0.305: v1(62.7,11.7) 63.8,11.7 70.1,18 v1(77.4,18)
ECG_LL: LL.2 R4.2 U1.11 | length 41.9
  Top Layer w0.305: v1(62.7,12.5) 62.782,12.418 U1.11 ; R4.2 77.403,15.2 v1(78.4,15.2) 78.7,15.2 88.96,25.46 LL.2
  Bottom Layer w0.305: v1(62.7,12.5) 63.6,12.5 69.8,18.7 77.8,18.7 78.4,18.1 v1(78.4,15.2)
ECG_RA: R3.2 RA.2 U1.12 | length 39.8
  Top Layer w0.305: v1(62.7,13.3) 62.752,13.3 63.134,12.918 U1.12 ; R3.2 77.406,13.8 v1(78.4,13.8) 81.888,13.8 RA.2
  Bottom Layer w0.305: v1(62.7,13.3) 63.55,13.3 68.595,18.345 ; 68.648,18.398 69.65,19.4 78,19.4 79.002,18.398 79.002,14.402 v1(78.4,13.8)
ECG_V1: R2.2 V1.2 | length 12.5
  Top Layer w0.381: R2.2 84.691,12.409 85.6,11.5 87.716,11.5 V1.2
ECG_V2: R1.2 V2.2 | length 14.2
  Top Layer w0.381: R1.2 82.691,11.012 V2.2
GND: C3.2 C4.2 C5.2 C11.2 C12.2 C23.2 D1.2 J1.GND J1.S U2.2 U2.8 U3.2 U3.14 | length 17.1
  Top Layer w0.381: C11.2@15.334,10.983 15.368,11.017 U2.2
  Top Layer w0.508: J1.GND 8.412,5.533 D1.2
  Top Layer w0.762: U3.14 14.064,18.891 U3.2
GND_ISO: C13.2 C14.2 C24.2 C25.2 C26.2 C27.2 C28.2 J8.1 J9.1 U2.9 U2.15 U3.5 | length 23.5
  Top Layer w0.305: U2.15@28.792,11.017 28.125,10.35 28.125,3.975 28.703,3.397 U2.9
  Top Layer w0.508: U3.5 24.234,15.791 28.792,11.233 28.792,11.017 U2.15 31.319,11.017 C13.2
  Bottom Layer w0.762: v1(39.2,11) 41.9,13.7 v1(42.1,13.7)
LED_B: Q4.1 R25.2 U4.16 | length 31
  Top Layer w0.305: Q4.1 22.255,29.43 R25.2 24.12,30 39.457,30 45.557,23.9 U4.16
LED_G: Q3.1 R24.2 U4.14 | length 33.7
  Top Layer w0.305: Q3.1 22.2,36.375 R24.2 25.5,34.425 25.5,33.248 27.748,31 39.743,31 45.843,24.9 U4.14
LED_R: Q2.1 R23.2 U4.15 | length 31.8
  Top Layer w0.305: Q2.1 23.395,32.775 R23.2 24.645,32.955 27.1,30.5 39.6,30.5 45.7,24.4 U4.15
NetC1_1: C1.1 C2.1 U1.7 U1.8 | length 3.5
  Top Layer w0.508: 63.784,10.668 64.568,10.668 64.86,10.96 C2.1 65.595,11.055 C1.1@67.1,11.055
NetC6_2: C6.2 R1.1 U1.2 | length 21.1
  Top Layer w0.305: U1.2 68.541,7.918 71.635,11.012 71.647,11 v1(72.4,11) 75.798,11 R1.1 ; v1(70.6,17.3) C6.2
  Bottom Layer w0.305: v1(70.6,17.3) 70.6,12.8 v1(72.4,11)
NetC7_2: C7.2 R2.1 U1.3 | length 19.5
  Top Layer w0.305: U1.3 68.118,8.418 72.109,12.409 R2.1 ; v1(71.9,17.3) C7.2
  Bottom Layer w0.305: v1(71.9,17.3) 71.9,12.9 v1(72.4,12.4)
NetC8_2: C8.2 R3.1 U1.4 | length 18.3
  Top Layer w0.305: U1.4 67.718,8.918 72.6,13.8 v1(73.2,13.8) 75.78,13.8 75.798,13.818 R3.1 ; v1(73.2,17.3) C8.2
  Bottom Layer w0.305: v1(73.2,13.8) v1(73.2,17.3)
NetC9_2: C9.2 R4.1 U1.5 | length 17.2
  Top Layer w0.305: U1.5 67.415,9.418 73.2,15.203 R4.1 ; v1(74.4,17.3) C9.2
  Bottom Layer w0.305: v1(74.4,15.2) v1(74.4,17.3)
NetC10_2: C10.2 R5.1 U1.6 | length 16.2
  Top Layer w0.305: U1.6 67.118,9.918 73.8,16.6 R5.1 75.8,16.61 C10.2
NetC22_1: C22.1 R7.1 U1.53 | length 3.3
  Top Layer w0.305: C22.1 60.789,3.356 R7.1 61.284,5.038 U1.53
NetC22_2: C22.2 R6.1 | length 1.4
  Top Layer w0.305: C22.2 62.25,1.755 R6.1
NetC36_1: C36.1 U4.30 | length 1.8
  Top Layer w0.305: C36.1@58.42,20.3 58.8,20.68 U4.30
NetC37_1: C37.1 C38.1 C39.1 R15.1 VIN1.1 VIN1.3 | length 9.7
  Top Layer w0.508: R15.1 40.48,4.396 41.877,4.396 43.274,4.396 43.352,4.474 VIN1.1 45.626,4.474 45.941,4.159 45.941,3.016 45.499,2.574 VIN1.3
NetC50_1: C50.1 U5.3 | length 1
  Top Layer w0.305: C50.1@38.4,15.2 U5.3
NetD1_3: D1.3 F1.2 J1.VBUS | length 10
  Top Layer w0.381: D1.3 9.096,4.906 v1(9.238,5.048)
  Top Layer w0.508: J1.VBUS 10.267,8.133 ; v1@10.295,8.105 10.267,8.133 ; F1.2 10.267,8.133
  Bottom Layer w0.381: v1(9.238,5.048) 9.238,6.699 v1(10.381,7.842)
NetD2_B: D2.B R22.2 | length 5.3
  Top Layer w0.305: D2.B 14.56,31.9 R22.2
NetD2_G: D2.G R21.2 | length 5.8
  Top Layer w0.305: D2.G 14.26,38.55 15.805,38.55 R21.2
NetD2_R: D2.R R20.2 | length 4.4
  Top Layer w0.305: D2.R 14.35,36.555 R20.2
NetJ10_1: J10.1 Q1.3 | length 2.6
  Top Layer w0.508: Q1.3 48.298,36.6 J10.1
NetL1_1: L1.1 U5.11
  other v1: 34.9,22.6 35.5,22.6 36.1,22.6
  other v3: 37.6,17.6 37.6,18 37.6,18.4 37.6,18.8
NetL1_2: L1.2 U5.9
  other v1: 39.775,22.55 40.375,22.575 40.975,22.575
  other v3: 38.7,17.6 38.7,18 38.7,18.4 38.7,18.8
NetQ2_D: Q2.3 R20.1 | length 1.4
  Top Layer w0.305: R20.1 Q2.3
NetQ3_D: Q3.3 R21.1 | length 1.4
  Top Layer w0.305: R21.1 18.82,37.225 Q3.3
NetQ4_D: Q4.3 R22.1 | length 2.2
  Top Layer w0.305: R22.1 20.15,30.52 Q4.3
NetR8_1: R8.1 U2.13 | length 2
  Top Layer w0.508: U2.13 31.623,8.477 R8.1
NetR9_1: R9.1 U2.12 | length 1.9
  Top Layer w0.508: U2.12 R9.1
NetR10_2: R10.2 U2.5 | length 2.1
  Top Layer w0.381: R10.2 18.161,7.207 U2.5
NetR11_2: R11.2 U2.6 | length 5.9
  Top Layer w0.381: R11.2 U2.6
NetR12_1: R12.1 U2.11 | length 1.9
  Top Layer w0.762: U2.11 29.773,5.9 R12.1
NetR13_2: R13.2 U2.7 | length 3
  Top Layer w0.381: R13.2 U2.7
NetR14_1: R14.1 U2.10 | length 1.9
  Top Layer w0.762: U2.10 29.803,4.6 R14.1
NetR17_2: R17.2 U5.1 U5.14 | length 3.1
  Top Layer w0.305: R17.2 35.62,17.125 U5.14 37.275,17.125 37.4,17 U5.1
NetR26_2: R26.2 R27.1 U5.5 | length 8.3
  Top Layer w0.305: U5.5 45.675,16.625 R27.1 47.595,16.1 R26.2
NetTP1_1: TP1.1 U4.41 | length 1.6
  Top Layer w0.305: U4.41 63.4,27.9 TP1.1
NetU4_5: U4.5 Y1.1 | length 5.6
  Top Layer w0.305: Y1.1 46.2,29.4 U4.5
NetU4_6: U4.6 Y1.3 | length 3.8
  Top Layer w0.305: Y1.3 47.62,28.9 U4.6
NRESET: J11.5 R28.2 U4.7 | length 33.1
  Top Layer w0.305: R28.2@48.6,27.695 49.305,28.4 U4.7
  Bottom Layer w0.254: 49.6,28.6 49.6,36.971 51.329,38.7
  Bottom Layer w0.305: v1(49.025,28.025) 49.6,28.6 ; 51.329,38.7 63.6,38.7 66.81,35.49 J11.5
OLED_CS: J10.7 U4.50 | length 6.2
  Top Layer w0.305: U4.50 59.3,34.5 59.7,34.9 61.95,34.9 J10.7
OLED_DC: J10.6 U4.59 | length 10.7
  Top Layer w0.254: U4.59 54.8,37.2 55.3,37.7 59.898,37.7 J10.6
OLED_EN: Q1.1 R16.2 U4.2 | length 11.3
  Top Layer w0.305: R16.2 42.555,37.55 Q1.1 43.825,37.175 48,33 48,32.3 49.4,30.9 U4.2
OLED_MOSI: J10.4 U4.53 | length 3.9
  Top Layer w0.305: J10.4 57.8,34.718 U4.53
OLED_RESET: J10.5 U4.52 | length 3.2
  Top Layer w0.305: U4.52 58.307,33.407 58.307,36.337 J10.5
OLED_SCK: J10.3 U4.51 | length 8.2
  Top Layer w0.254: U4.51 58.8,35 59,35.2 v1(59.1,35.2)
  Bottom Layer w0.254: J10.3 54.778,35.2 v1(59.1,35.2)
RLD_OUT: R6.2 R7.2 RLD.2 U1.54 | length 16.5
  Top Layer w0.305: U1.54 61.784,5.139 R7.2 62.379,3.374 R6.2
  Top Layer w0.381: R6.2 62.505,3.295 63.55,2.25 73.05,2.25 RLD.2
SHIELD: LA.1 LA.3 LL.1 LL.3 RA.1 RA.3 RLD.1 RLD.3 U1.18 V1.1 V1.3 V2.1 V2.3 | length 23.5
  Top Layer w0.305: v1(61.284,14.109) U1.18
  Bottom Layer w0.762: v1(61.284,14.109) 61.609,14.109 69,21.5 80.9,21.5
  other v1: 70,1.5 72,1.5 74,1.5 76,1.5 78,1.5 80,1.5 82,1.5 84,1.5 86,1.5 88,1.5 90,1.5 92,1.5 94,1.5 70,3.5 80,3.5 82,3.5 84,3.5 86,3.5 88,3.5 90,3.5 92,3.5 94,3.5 70,5.5 72,5.5 74,5.5 76,5.5 78,5.5 80,5.5 82,5.5 84,5.5 94,5.5 70,7.5 72,7.5 74,7.5 76,7.5 78,7.5 80,7.5 82,7.5 84,7.5 88,7.5 90,7.5 92,7.5 94,7.5 72,9.5 74,9.5 76,9.5 78,9.5 80,9.5 82,9.5 86,9.5 88,9.5 90,9.5 92,9.5 94,9.5 84,11.5 90,11.5 92,11.5 94,11.5 73,11.7 74,11.7 80,11.75 82,11.75 72.8,13.1 74,13.1 80,13.1 82,13.1 84,13.5 94,13.5 74,14.5 80,15.5 82,15.5 86,15.5 88,15.5 90,15.5 92,15.5 94,15.5 75.1,15.9 82,17.5 84,17.5 88,17.5 90,17.5 92,17.5 94,17.5 80.1,18.3 78.8,19.5 82,19.5 84,19.5 86,19.5 90,19.5 92,19.5 94,19.5 80,20.8 84,21.5 94,21.5 80.75,22 80,23.5 82,23.5 86,23.5 88,23.5 90,23.5 92,23.5 94,23.5 80,25.5 82,25.5 84,25.5 86,25.5 88,25.5 90,25.5 92,25.5 94,25.5 80,27.5 82,27.5 84,27.5 86,27.5 88,27.5 90,27.5 92,27.5 94,27.5 80,29.5 82,29.5 84,29.5 94,29.5 80,31.5 82,31.5 84,31.5 86,31.5 88,31.5 90,31.5 92,31.5 94,31.5 80,33.5 82,33.5 84,33.5 86,33.5 88,33.5 90,33.5 92,33.5 94,33.5 80,35.5 82,35.5 84,35.5 86,35.5 88,35.5 90,35.5 92,35.5 94,35.5 80,37.5 82,37.5 84,37.5 94,37.5 80,39.5 82,39.5 84,39.5 86,39.5 88,39.5 90,39.5 92,39.5 94,39.5
SW: C48.1 R18.2 S1.1 U4.62 | length 43.3
  Top Layer w0.305: S1.1@26.04,28.55 26.79,29.3 v1(27.3,29.3) ; S1.1@26.04,37.65 27.847,39.457 38.369,39.457 39.4,38.426 C48.1 40.75,38.345 R18.2 41.407,39.002 46.075,39.002 46.077,39 48.2,39 49.5,37.7 51.5,37.7 52.2,37 52.2,35.6 53.3,34.5 U4.62 ; S1.1@26.54,37.65 26.54,34.685 27.9,33.325 v1(27.9,32.4)
  Bottom Layer w0.305: v1(27.3,29.3) 27.3,31.3 27.9,31.9 v1(27.9,32.4)
SW2: C49.1 R19.2 S2.1 U4.3 | length 23.2
  Top Layer w0.305: S2.1@37.56,28.55 37.95,28.55 v1(38.7,29.3) ; S2.1@37.56,37.65 37.56,35.895 C49.1 C49.1@39.45,34.005 ; v1(38.7,31.7) 39.45,32.45 C49.1@39.45,34.005 ; U4.3 48.448,30.4 44.95,33.898 40.907,33.898 R19.2 C49.1@39.45,34.005
  Bottom Layer w0.305: v1(38.7,29.3) v1(38.7,31.7)
SWCLK: J11.4 U4.49 | length 13.5
  Top Layer w0.305: U4.49 60.55,34.15 62.125,34.15 63.175,35.2 66.35,35.2 68.1,33.45 68.1,31.505 J11.4
SWDIO: J11.2 U4.46 | length 11.2
  Top Layer w0.305: U4.46 63.048,30.4 63.15,30.298 64.602,30.298 65.9,29 70.225,29 71.48,30.255 J11.2
SWO: J11.6 U4.55 | length 12.8
  Top Layer w0.305: v1(56.8,32.375) U4.55
  Bottom Layer w0.305: v1(56.8,32.375) 57.425,33 64.65,33 66.81,30.84 J11.6
UD+: D1.1 D1.4 J1.D_P R13.1 | length 10
  Top Layer w0.381: J1.D_P 7.808,6.833 D1.1 8.995,6.206 D1.4 10.534,4.667 R13.1
UD-: D1.5 J1.D_N R11.1 | length 6.8
  Top Layer w0.381: J1.D_N 9.018,7.483 D1.5 12.492,6.206 R11.1
V_ISO: C13.1 C24.1 C25.1 C26.1 C27.1 C28.1 C29.1 C30.1 C31.1 R15.2 R17.1 U2.16 U3.6 U4.42 U5.12 U5.13 | length 49.1
  Top Layer w0.305: R17.1 35.24,18.335 C31.1 ; v1(60.425,27.875) 60.95,28.4 U4.42
  Top Layer w0.508: R15.2 40.48,7.93 v1@43.42,10.87
  Top Layer w0.762: C30.1 v1(34.4,20.06) 35,20.06 35.24,19.82 C31.1 36.3,18.4 U5.12@36.7,18 ; C28.1 40.555,13.445 43.129,10.87 v1@43.42,10.87
  Bottom Layer w0.305: v1(43.45,10.9) v1(60.425,27.875)
  Bottom Layer w0.762: v1(32.1,13.9) 32.1,17.76 v1(34.4,20.06)
VBUS: C3.1 C4.1 C5.1 C11.1 C23.1 F1.1 U2.1 U3.1
VDD1: C12.1 R10.1 U2.3 U2.4 | length 5.2
  Top Layer w0.381: C12.1 17.399,9.493 R10.1 18.415,8.477 U2.4 U2.3
VDD2: C14.1 R8.2 R9.2 U2.14 | length 5.9
  Top Layer w0.305: R8.2 31.994,10.161 33.18,8.975 C14.1
  Top Layer w0.508: U2.14 30.701,9.747 31.115,10.161 R8.2 ; R9.2 C14.1@33.18,8.975
pads on no net: J1. J1.ID U1.13 U1.16 U1.17 U1.23 U1.26 U1.27 U1.37 U1.38 U1.39 U1.40 U1.44 U1.46 U1.47 U1.48 U1.52 U1.55 U3.7 U3.8 U4.1 U4.4 U4.8 U4.9 U4.10 U4.11 U4.26 U4.28 U4.29 U4.33 U4.34 U4.35 U4.36 U4.37 U4.38 U4.39 U4.40 U4.43 U4.54 U4.56 U4.57 U4.58 U4.60 U4.61 U5.2 VIN1.4

## Polygon pours and split planes (outlines as drawn)
GND on Top Layer "Top Layer-GND" (solid, pour order 8): 21.811,13.049 15.2,19.66 15.2,26.8 13.3,26.8 1.11,26.8 1.11,1.619 21.811,1.619
GND_ISO on Top Layer "Top Layer-GND_ISO" (solid, pour order 30): 40.425,12.7 40.425,10.625 38.8,9 38.8,2.35 28.6,2.35 27.975,2.975 27.975,10.825 28.825,11.675 31.9,11.675 32.925,12.7
DGND on Top Layer "Top Layer-DGND" (solid, pour order 20): 43.425,14.175 51.6,6 57.875,6 57.875,19.272 62.225,19.272 62.25,22.15 65,22.15 64.981,28.275 74.028,28.275 74.028,39.25 65,39.25 62.225,39.25 11.7,39.25 11.7,34.127 21.441,27.439 31.8,27.456 31.8,16.6 34.225,14.175
V_ISO on Top Layer "Top Layer-V_ISO" (solid, pour order 28): 40.25,13.2 32.525,13.2 32.275,12.95 32.275,12.05 30.95,12.05 30.75,11.85 28.575,11.85 25.9,14.525 25.9,17.875 31.3,17.875 31.3,14.1 40.65,14.1 40.65,13.6
NetL1_1 on Top Layer "Top Layer-NetL1_1" (solid, pour order 18): 37.8,19 37.8,17.4 37.3,17.4 37.3,19
NetL1_2 on Top Layer "Top Layer-NetL1_2" (solid, pour order 16): 39,17.4 39,19 38.5,19 38.5,17.4
DVDD on Top Layer "Top Layer-DVDD" (solid, pour order 2): 49.37,18.256 49.37,16.986 40.514,16.986 40.1,17.4 39.2,17.4 39.2,18.35 40.063,19.213 40.063,20 41.177,20 41.177,18.723 41.644,18.256
SHIELD on Top Layer "Bottom Layer-SHIELD" (solid, pour order 24): 94.3,39.7 94.3,1.1 69.3,1.1 69.3,10.5 79.5,20.7 79.5,39.7
AGND on Top Layer "Top Layer-AGND" (solid, pour order 22): 39.591,5.75 39.591,0.857 68.908,0.857 68.891,11.8 69.592,11.8 69.611,18.531 76.7,18.481 76.7,21.7 62.55,21.7 62.55,19 59.022,19 59.022,15.081 59.022,5.75
VBUS on Top Layer "Top Layer-VBUS" (solid, pour order 6): 21.176,11.906 9.873,11.906 9.873,18.383 13.81,18.383 15.461,16.732 15.461,14.979 17.715,13.176 21.176,13.176
DGND on Bottom Layer "Top Layer-DGND" (solid, pour order 34): 34.225,14.175 43.525,14.175 51.7,6 57.85,6 57.85,19.222 62.2,19.222 62.225,22.1 64.975,22.1 64.95,28.275 74.05,28.275 74.05,39.2 64.975,39.2 62.2,39.2 11.675,39.2 11.675,34.077 21.416,27.389 32.4,27.389 32.4,16 32.607,15.793
NetL1_2 on Bottom Layer "Bottom Layer-NetL1_2" (solid, pour order 14): 38.448,17.4 38.448,21.723 39.65,22.925 41.302,22.925 41.302,21.364 38.956,19.018 38.956,17.4
NetL1_1 on Bottom Layer "Bottom Layer-NetL1_1" (solid, pour order 12): 37.8,17.4 37.8,21.4 36.25,22.95 34.578,22.95 34.578,21.364 37.3,18.642 37.3,17.4
SHIELD on Bottom Layer "Bottom Layer-SHIELD" (solid, pour order 36): 94.3,39.7 94.3,1.1 69.3,1.1 69.3,10.5 79.5,20.7 79.5,39.7
AGND on Bottom Layer "Top Layer-AGND" (solid, pour order 26): 39.591,5.75 39.591,0.857 68.908,0.857 68.891,11.8 69.592,11.8 69.611,18.531 76.7,18.481 76.7,21.7 62.525,21.7 62.525,19 59.022,19 59.022,15.081 59.022,5.75

## Silkscreen, mask and mechanical layers (free items; w line width, h text height)
Mechanical 1:
  the board outline again, w0.2

## Text inside footprints (layer, text, board x,y; h text height)
U5: Mechanical 19 "Designator" at 38.194,16.093 h0.4 r90